# Altium PCB F4SDR3.PcbDoc
Units mil, origin at the board's own origin, x right, y up, seen from the top; angles counter-clockwise.
Board outline 1528 x 1869 mil, 4 copper layers (Top Layer, Internal Plane 1, Signal Layer 1, Bottom Layer), stack 60.752 mil thick; 63 components, 134 nets, 173 pads, 20 vias.
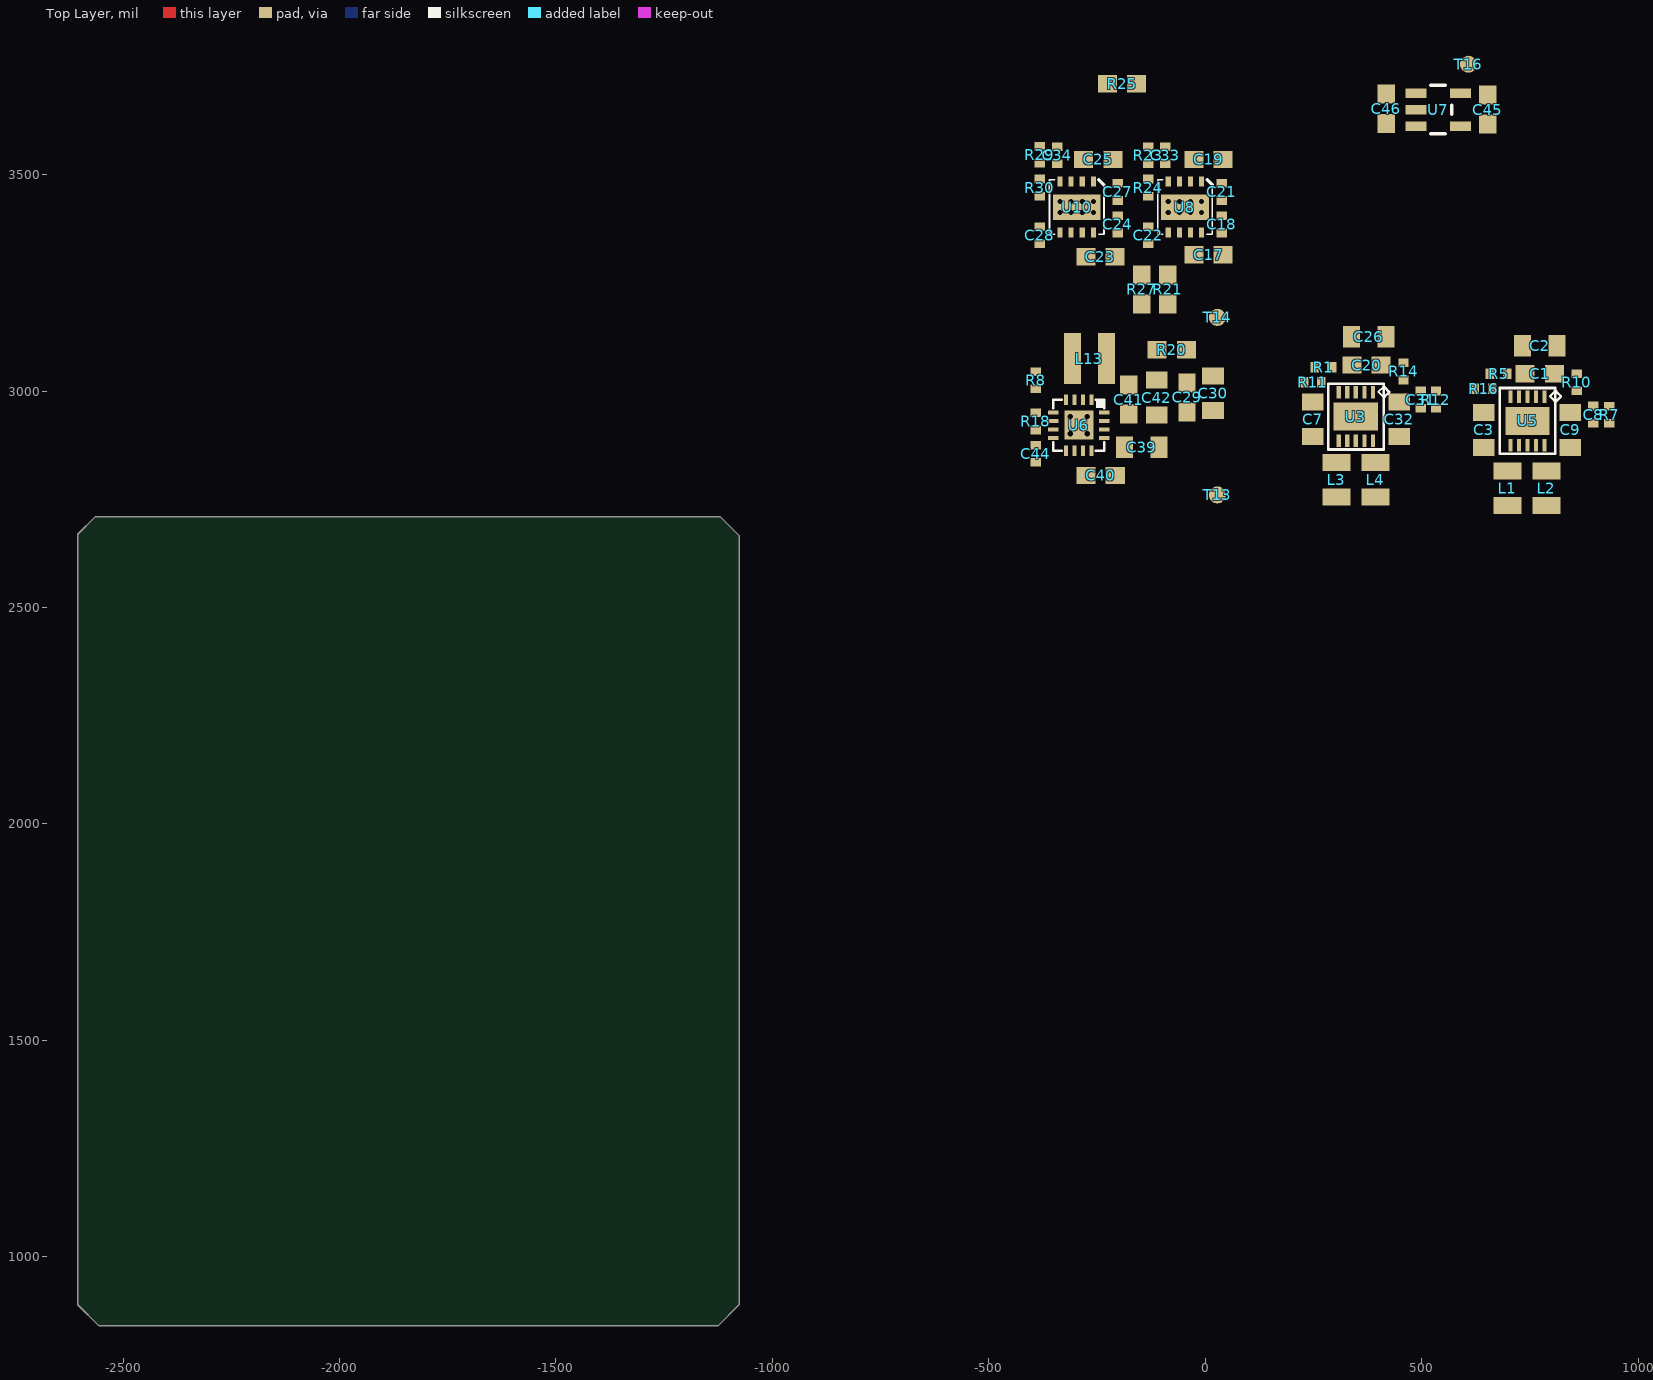
[diagram p0: Top Layer view]
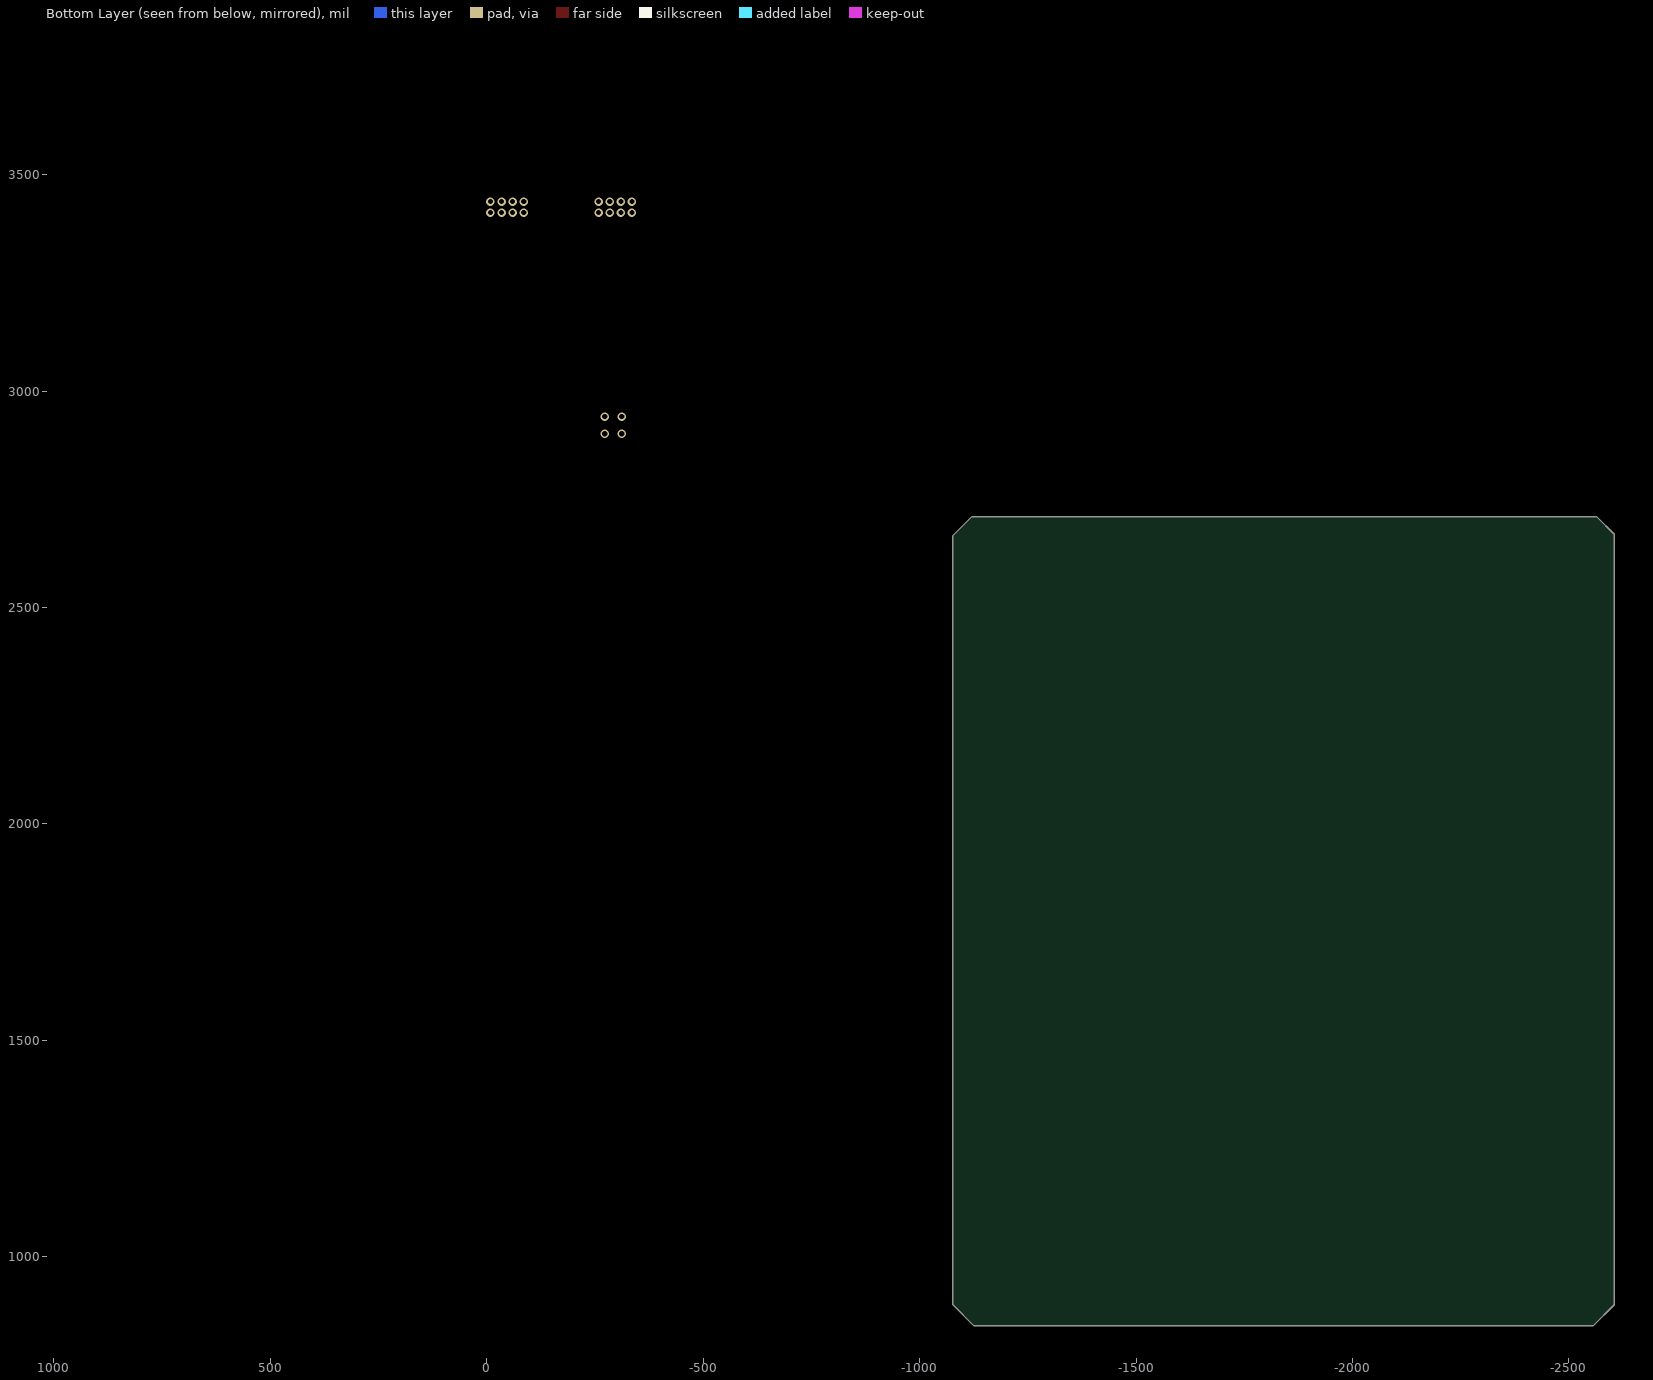
[diagram p1: Bottom Layer view, seen from below]
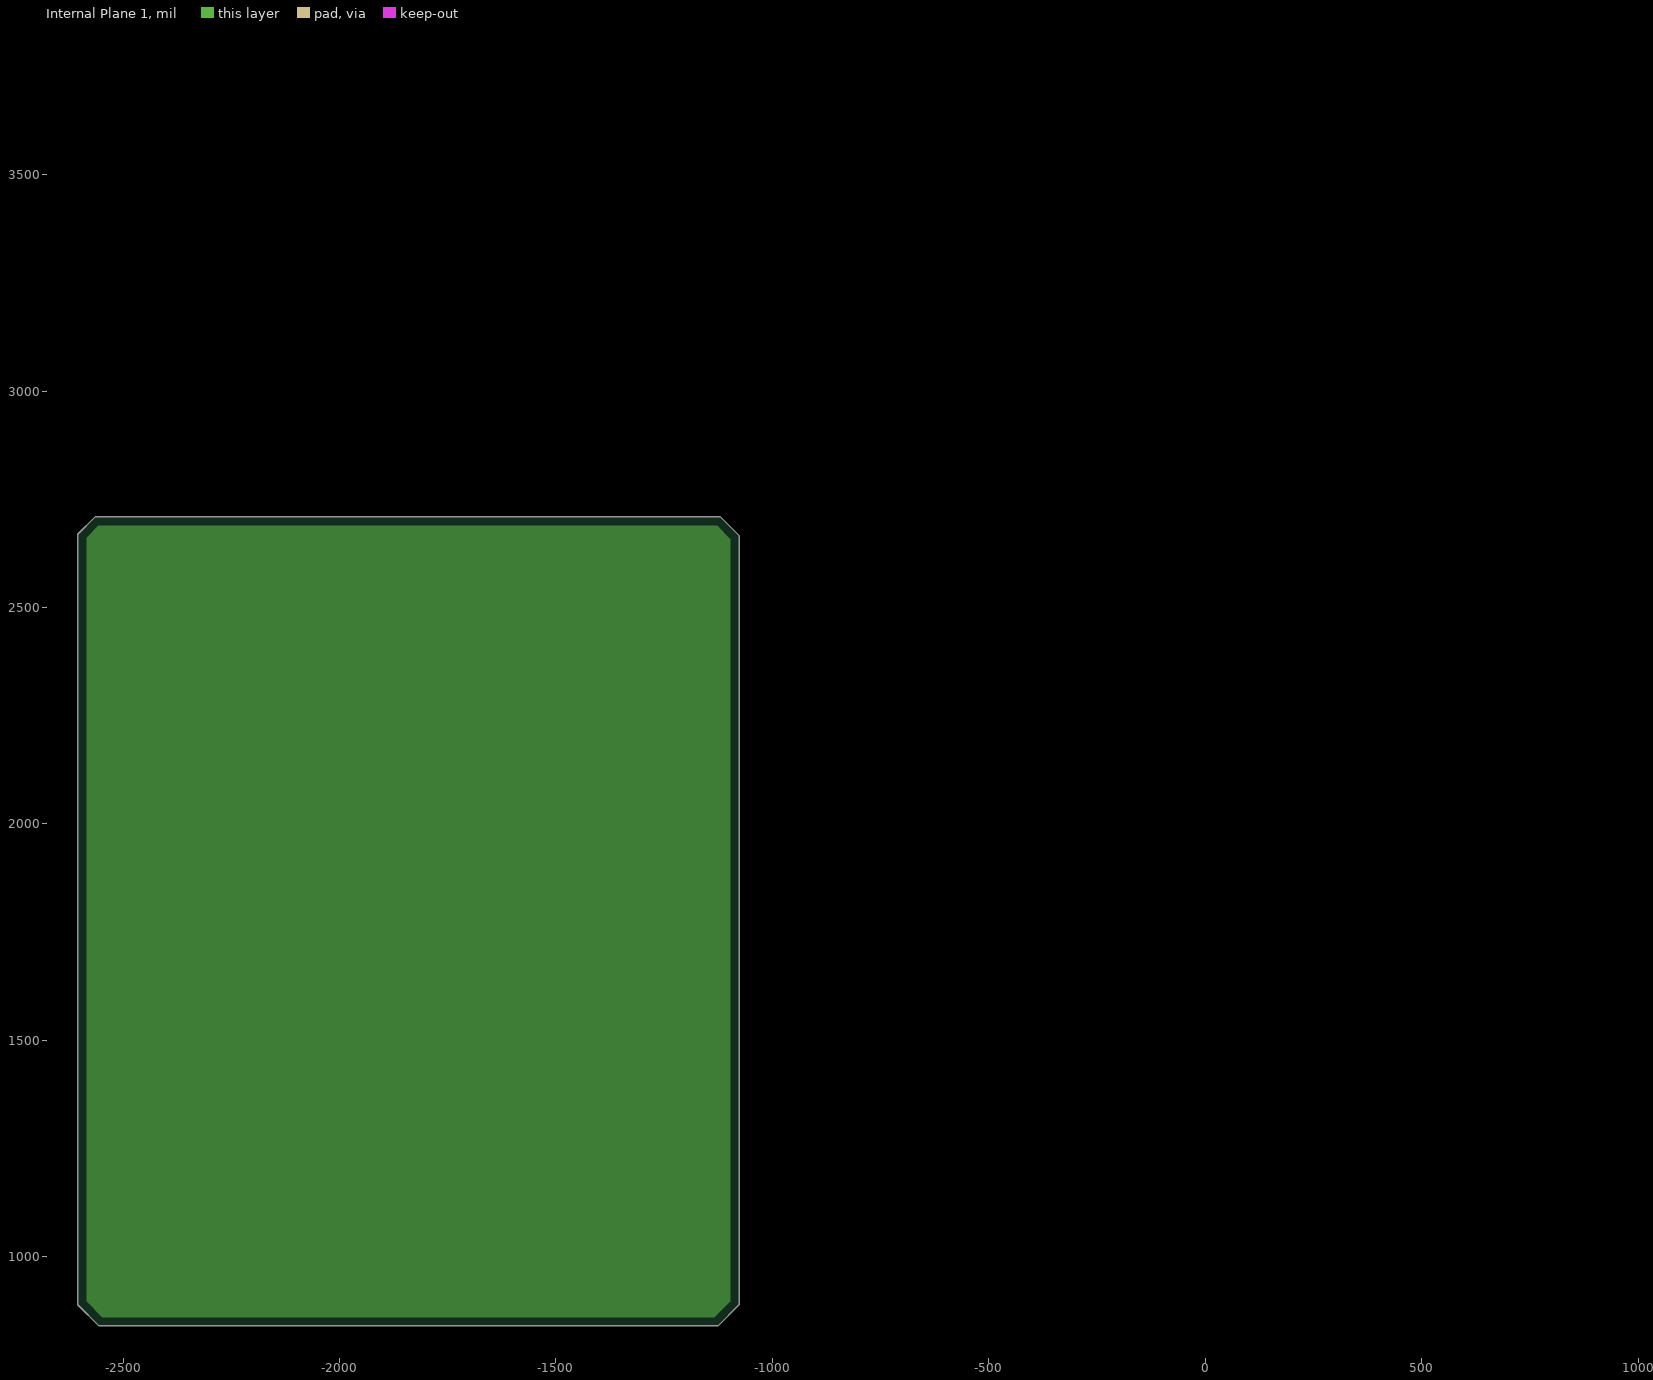
[diagram p2: Internal Plane 1, clearances drawn from the general rule]

## Layer stack, top to bottom
Top Solder: solder mask 0.4, Solder Resist, Dk 3.5
Top Layer: signal copper 1.4
Dielectric 1: prepreg 7.874, FR-4, Dk 4.2
Internal Plane 1: plane copper 1.4169, net GND
Dielectric 3: core 39.3701, Dk 4.2
Signal Layer 1: signal copper 1.4169
Dielectric 2: prepreg 7.874, Dk 4.2
Bottom Layer: signal copper 1.4
Bottom Solder: solder mask 0.4, Solder Resist, Dk 3.5

## Board outline
-2605,889 -2605,2669 -2565,2709 -1120,2709 -1077,2666 -1077,889 -1126,840 -2556,840

## Design rules (kind name [scope] priority, off if disabled: settings)
Clearance Clearance_1 [(InNamedPolygon('Bottom Layer-No Net')) vs Not InNet('GND')] p1: gap=15
Clearance [All] p2: gap=6
DiffPairsRouting [All] p1: maxlimit=10 minlimit=10 mostfreqgap=10 toplayer_minwidth=5.98 toplayer_maxwidth=15 toplayer_prefwidth=15 midlayer1_minwidth=5.98 midlayer1_maxwidth=15 midlayer1_prefwidth=15 bottomlayer_minwidth=5.98 bottomlayer_maxwidth=15 bottomlayer_prefwidth=15 maxuncoupledlength=500
MinimumSolderMaskSliver [All] p1 off: minsoldermaskwidth=10
PlaneClearance [All] p1: clearance=10
PlaneConnect [All] p1: planeconnectstyle=Direct reliefexpansion=20 reliefentries=4 reliefconductorwidth=10 reliefairgap=10
PolygonConnect [All] p1: connectstyle=Direct reliefconductorwidth=10 reliefentries=4 polygonreliefangle="90 Angle" airgapwidth=10
RoomDefinition Detector [InComponentClass('Detector')] p1 off: confinementstyle=ConfineIn formatcopy=TRUE lockcomponents=FALSE outline -1032,1519 6547,1519 6547,1914 -1032,1914
RoomDefinition Wideband [InComponentClass('Wideband')] p2 off: confinementstyle=ConfineIn formatcopy=TRUE lockcomponents=FALSE outline -591,2547 4878,2547 4878,2942 -591,2942
RoomDefinition 5.8FEM [InComponentClass('5.8FEM')] p3 off: confinementstyle=ConfineIn formatcopy=TRUE lockcomponents=FALSE outline -591,1339 9751,1339 9751,1734 -591,1734
RoomDefinition power [InComponentClass('power')] p4 off: confinementstyle=ConfineIn formatcopy=TRUE lockcomponents=FALSE outline -595,900 1750,900 1750,1140 -595,1140
RoomDefinition 400M [InComponentClass('400M')] p5 off: confinementstyle=ConfineIn formatcopy=TRUE lockcomponents=FALSE outline 1440,800 8825,800 8825,1200 1440,1200
RoomDefinition 2.4FEM [InComponentClass('2.4FEM')] p6 off: confinementstyle=ConfineIn formatcopy=TRUE lockcomponents=FALSE outline 1485,2340 4295,2340 4295,4060 1485,4060
RoutingVias [All] p1: holewidth=12 width=20 viastyle="Through Hole" minholewidth=11.81 minwidth=19.68 maxholewidth=28 maxwidth=50
SilkToBoardRegionClearance [All] p1 off:
SilkToSilkClearance [All] p1 off: silktosilkclearance=10
SilkToSolderMaskClearance [IsPad] p1 off: minsilkscreentomaskgap=10 clearancetoexposedcopper=TRUE
SolderMaskExpansion [All] p1: expansion=4
UnpouredPolygon [All] p1: allowunpoured=FALSE
Width [All] p1: maxlimit=60 minlimit=6 preferedwidth=6
22 further rules are at their usual default settings.

## Classes and differential pairs
component class 400M: C63 C64 C73 L21
component class power: R28

## Components (designator, comment, footprint, x,y, rotation, side; value= is the part's Value field where it differs from the comment)
C1 "1uF" 0603 773,3040 r180 top
C2 "10UF" 0805 773,3105 r180 top
C3 "10uF" 0805 643,2910 r270 top
C7 "10uF" 0805 248,2935 r270 top
C8 "33pF" 0402 896.29,2945.55 r90 top
C9 "10uF" 0805 843,2910 r270 top
C17 "2.2uF" 0603 8,3315 r180 top
C18 "0.1uF" 0402 38,3385 r270 top
C19 "2.2uF" 0603 8,3535 r180 top
C20 "1uF" 0603 373,3060 r180 top
C21 "0.1uF" 0402 38,3460 r90 top
C22 "0.1uF" 0402 -132,3360 r270 top
C23 "2.2uF" 0603 -242,3310 r180 top
C24 "0.1uF" 0402 -202,3385 r270 top
C25 "2.2uF" 0603 -247,3535 r180 top
C26 "10UF" 0805 378,3125 r180 top
C27 "0.1uF" 0402 -202,3460 r90 top
C28 "0.1uF" 0402 -382,3360 r270 top
C29 "Cap" 0603 -42,2985 r90 top
C30 "Cap" 0805 18,2995 r90 top
C31 "33pF" 0402 498,2980 r90 top
C32 "10uF" 0805 448,2935 r270 top
C33 "3.3nF" 0402 -92,3545 r270 top
C34 "3.3nF" 0402 -342,3545 r270 top
C39 "Cap" 0805 -147,2870 r0 top
C40 "Cap" 0603 -242,2805 r0 top
C41 "Cap" 0603 -177,2980 r90 top
C42 "Cap" 0805 -112,2985 r90 top
C44 "3.3nF" 0402 -392,2855 r90 top
C45 "4.7uF" 0603 653,3650 r90 top
C46 "4.7uF" 0603 418,3652 r90 top
L1 "2.2UH" 0806 698,2775 r270 top
L2 "2.2uH" 0806 788,2775 r270 top
L3 "2.2UH" 0806 303,2795 r270 top
L4 "2.2uH" 0806 393,2795 r270 top
L13 "2.2uH" L3015 -307,3075 r0 top
R1 "220k" 0402 273,3055 r180 top
R5 "180k" 0402 678,3040 r180 top
R7 "300k" 0402 933,2945 r90 top
R8 "17.5k" 0402 -392,3025 r270 top
R10 "68k" 0402 858,3020 r90 top
R11 "180k" 0402 248,3020 r180 top
R12 "360k" 0402 533,2980 r90 top
R14 "180k" 0402 458,3045 r90 top
R16 "180k" 0402 643,3005 r180 top
R18 "10k 1%" 0402 -392,2930 r270 top
R20 "FB" 0603 -77,3095 r180 top
R21 "FB" 0603 -87,3235 r270 top
R23 "6.25k" 0402 -132,3545 r270 top
R24 "10k" 0402 -132,3470 r270 top
R25 "NC/0R" 0603 -192,3710 r180 top
R27 "FB" 0603 -147,3235 r270 top
R29 "6.25k" 0402 -381.98,3545.91 r270 top
R30 "10k" 0402 -382,3470 r270 top
T13 "TestPad" "TestPad - 1mm" 28,2760 r90 top
T14 "TestPad" "TestPad - 1mm" 28,3170 r90 top
T16 "TestPad" "TestPad - 1mm" 608,3755 r90 top
U3 "Tps62410" DFN-10P-3X3 348,2940 r270 top
U5 "Tps62410" DFN-10P-3X3 744.65,2929.84 r270 top
U6 "TPS62130" TPS62130 -292.24,2921.02 r270 top
U7 "RT9013-28GB" SOT23-5 538,3650 r270 top
U8 "TPS7A8101" TPS7A8101 -47,3425 r270 top
U10 "TPS7A8101" TPS7A8101 -297,3425 r270 top

## Footprints (in the part's own frame and the unit in brackets; to place one, negate y for a bottom-side part, rotate by r counter-clockwise, add the part's x,y. Pads: shape width x height; smd on the part's side, far side on the other; paste and mask are expansions set on the pad)
0402 [mil] "0402-RES"
  rect 20x24 smd: 1(-19.68,0) 2(20,0)
0603 [mil] "0603-RES"
  rect 44x40 smd: 1(-33.46,0) 2(34,0)
0805 [mil]
  rect 39.37x50 smd: 1(-40,0) 2(40,0)
  body extent -50,-30 50,30, height 31
0806 [mm]
  rect 1x1.65 smd: 1(-1.016,0) 2(1.016,0)
  body extent -1,-0.8 1,0.8, height 0.5
DFN-10P-3X3 [mm]
  rect 0.75x0.25 smd mask+0.064: 1(-1.451,0.999) 2(-1.451,0.499) 3(-1.451,-0.001) 4(-1.451,-0.501) 5(-1.451,-1.001) 6(1.4,-1.001) 7(1.4,-0.501) 8(1.4,-0.001) 9(1.4,0.499) 10(1.4,0.999)
  rect 1.64x2.6 smd: 11(-0.025,-0.001)
  silkscreen extent -1.96,-1.63 1.9,1.95
L3015 [mm]
  rect 1x3 smd: 1(0,0) 2(2,0)
SOT23-5 [mil] "SOT23-5"
  rect 22x48 smd: 1(-37.4,-51.19) 2(0,-51.19) 3(38,-51.19) 4(38,52) 5(-37.4,52)
  silkscreen extent -56,-17 56,32
"TestPad - 1mm" [mm]
  round 1 smd: 1(0,0)
TPS7A8101 [mm]
  rect 1.5x2.8 smd: 0(0,0)
  rect 0.6x0.3 smd: 1(-1.5,0.975) 2(-1.5,0.325) 3(-1.5,-0.325) 4(-1.5,-0.975) 5(1.5,-0.975) 6(1.5,-0.325) 7(1.5,0.325) 8(1.5,0.975)
  silkscreen extent -1.6,-1.6 1.6,1.6, body extent -1.5,-1.5 1.5,1.5, height 0.6
TPS62130 [mm]
  rect 1.7x1.7 smd: 0(0,0)
  rect 0.6x0.25 smd: 1(-1.5,0.75) 2(-1.5,0.25) 3(-1.5,-0.25) 4(-1.5,-0.75) 9(1.5,-0.75) 10(1.5,-0.25) 11(1.5,0.25) 12(1.5,0.75)
  rect 0.25x0.6 smd: 5(-0.75,-1.5) 6(-0.25,-1.5) 7(0.25,-1.5) 8(0.75,-1.5) 13(0.75,1.5) 14(0.25,1.5) 15(-0.25,1.5) 16(-0.75,1.5)
  silkscreen extent -1.5,-1.5 1.5,1.5, body extent -1.5,-1.5 1.5,1.5, height 0.6

## Part data
C1 C2 C20 C26: library part CAP/0402
C3 C7 C9 C32 C33 C34 C44 C45 C46: library part Cap, "Capacitor"
C8 C17 C18 C19 C21 C22 C23 C24 C25 C27 C28 C31: library part CAP0402-CAP, "<b>Capacitor</b> / Standard 0603 ceramic capacitor, and 0.1\" leaded capacitor."
C29 C30 C39 C40 C41 C42: "Capacitor"
L1 L2 L3 L4: library part L/2.5*2.0
L13: library part Inductor, "Inductor"
R1 R5 R7 R8 R10 R11 R12 R14 R16 R18 R20 R21 R23 R24 R25 R27 R29 R30: library part Res2, "Resistor"
U7: library part LP5907

## Via types
v1: diameter 19.68, hole 11.81, Top Layer to Bottom Layer, 20 vias

## Nets (pads, with @x,y where several pads share a name; then routed paths per layer and width w, separated by ;. In a path a pad name is that pad's centre, name@x,y a point inside that pad or via, vN(x,y) a via of type N, cw(c..) or ccw(c..) an arc to the next point about the centre after c; other vN are vias at no path point)
3.3LNA: 
3.6V: 
5V: 
GND: 
NetAnt1_1: 
NetAnt2_1: 
NetAnt3_1: 
NetAnt4_1: 
NetAnt5_1: 
NetAnt6_1: 
NetAnt7_1: 
NetAnt8_1: 
NetAnt9_1: 
NetAnt10_1: 
NetAnt11_1: 
NetAnt12_1: 
NetAnt13_1: 
NetAnt14_1: 
NetC1_2: 
NetC2_2: 
NetC3_2: 
NetC4_2: 
NetC8_2: 
NetC10_1: 
NetC14_1: 
NetC16_1: 
NetC16_2: 
NetC18_2: 
NetC19_2: 
NetC20_2: 
NetC22_2: 
NetC23_2: 
NetC26_2: 
NetC28_2: 
NetC29_1: 
NetC34_1: 
NetC43_1: 
NetC44_1: 
NetC49_1: 
NetC54_1: 
NetC55_2: 
NetC57_2: 
NetC58_2: 
NetC62_1: 
NetC62_2: 
NetC67_1: 
NetC67_2: 
NetC68_2: 
NetC69_2: 
NetC71_2: 
NetC75_2: 
NetC76_2: 
NetC78_1: 
NetC79_1: 
NetC80_1: 
NetC84_1: 
NetC86_2: 
NetC88_1: 
NetC92_1: 
NetC93_1: 
NetJ1_1: 
NetJ1_3: 
NetJ2_1: 
NetJ3_3: 
NetJ4_2: 
NetJ4_3: 
NetJ5_1: 
NetJ5_2: 
NetJ5_3: 
NetJ6_3: 
NetJ7_1: 
NetJ7_2: 
NetJ7_3: 
NetJ8_2: 
NetJ8_3: 
NetJ9_1: 
NetJ9_3: 
NetJ11_1: 
NetJ11_3: 
NetJ12_2: 
NetJ12_3: 
NetJ13_1: 
NetJ13_3: 
NetJ14_3: 
NetJ15_1: 
NetJ15_2: 
NetJ15_3: 
NetJ16_3: 
NetJ17_1: 
NetJ17_3: 
NetJ18_3: 
NetJ19_1: 
NetJ19_2: 
NetJ19_3: 
NetJ20_3: 
NetJ21_1: 
NetJ21_2: 
NetJ22_2: 
NetJ22_3: 
NetL1_1: 
NetL3_1: 
NetL6_1: 
NetL7_1: 
NetL8_1: 
NetL10_1: 
NetL12_1: 
NetL13_1: 
NetLNA1_1: 
NetLNA2_1: 
NetLNA3_1: 
NetLNA4_1: 
NetR5_2: 
NetR10_2: 
NetR15_2: 
NetR16_2: 
NetR19_1: 
NetR21_1: 
NetR23_1: 
NetR24_1: 
NetR25_2: 
NetR29_2: 
NetR31_1: 
NetR31_2: 
NetR34_1: 
NetR38_1: 
NetR40_1: 
NetR41_1: 
NetT4_1: 
NetT18_1: 
NetT21_1: 
V2.4: 
VOUT: 
VREF2: 
VSYS: 
pads on no net: C1.1 C1.2 C2.1 C2.2 C3.1 C3.2 C7.1 C7.2 C8.1 C8.2 C9.1 C9.2 C17.1 C17.2 C18.1 C18.2 C19.1 C19.2 C20.1 C20.2 C21.1 C21.2 C22.1 C22.2 C23.1 C23.2 C24.1 C24.2 C25.1 C25.2 C26.1 C26.2 C27.1 C27.2 C28.1 C28.2 C29.1 C29.2 C30.1 C30.2 C31.1 C31.2 C32.1 C32.2 C33.1 C33.2 C34.1 C34.2 C39.1 C39.2 C40.1 C40.2 C41.1 C41.2 C42.1 C42.2 C44.1 C44.2 C45.1 C45.2 C46.1 C46.2 L1.1 L1.2 L2.1 L2.2 L3.1 L3.2 L4.1 L4.2 L13.1 L13.2 R1.1 R1.2 R5.1 R5.2 R7.1 R7.2 R8.1 R8.2 R10.1 R10.2 R11.1 R11.2 R12.1 R12.2 R14.1 R14.2 R16.1 R16.2 R18.1 R18.2 R20.1 R20.2 R21.1 R21.2 R23.1 R23.2 R24.1 R24.2 R25.1 R25.2 R27.1 R27.2 R29.1 R29.2 R30.1 R30.2 T13.1 T14.1 T16.1 U3.1 U3.2 U3.3 U3.4 U3.5 U3.6 U3.7 U3.8 U3.9 U3.10 U3.11 U5.1 U5.2 U5.3 U5.4 U5.5 U5.6 U5.7 U5.8 U5.9 U5.10 U5.11 U6.0 U6.1 U6.2 U6.3 U6.4 U6.5 U6.6 U6.7 U6.8 U6.9 U6.10 U6.11 U6.12 U6.13 U6.14 U6.15 U6.16 U7.1 U7.2 U7.3 U7.4 U7.5 U8.0 U8.1 U8.2 U8.3 U8.4 U8.5 U8.6 U8.7 U8.8 U10.0 U10.1 U10.2 U10.3 U10.4 U10.5 U10.6 U10.7 U10.8
copper on no net:
  other v1: -311.92,2901.34 -272.55,2901.34 -311.92,2940.71 -272.55,2940.71 -335.39,3412.2 -309.8,3412.2 -284.2,3412.2 -258.61,3412.2 -85.39,3412.2 -59.8,3412.2 -34.2,3412.2 -8.61,3412.2 -335.39,3437.8 -309.8,3437.8 -284.2,3437.8 -258.61,3437.8 -85.39,3437.8 -59.8,3437.8 -34.2,3437.8 -8.61,3437.8

## Polygon pours and split planes (outlines as drawn)
GND on Internal Plane 1 (split plane): -1097.1,2657.68 -1097.1,897.32 -1134.33,860.1 -2547.67,860.1 -2584.9,897.32 -2584.9,2660.68 -2556.68,2688.9 -1128.32,2688.9